# Altium PCB open-rally-computer.pcbdoc
Units mil, origin at the board's own origin, x right, y up, seen from the top; angles counter-clockwise.
Board outline 3960 x 3635 mil, 2 copper layers (Top Layer, Bottom Layer); 24 components, 52 nets, 141 pads, 9 vias.
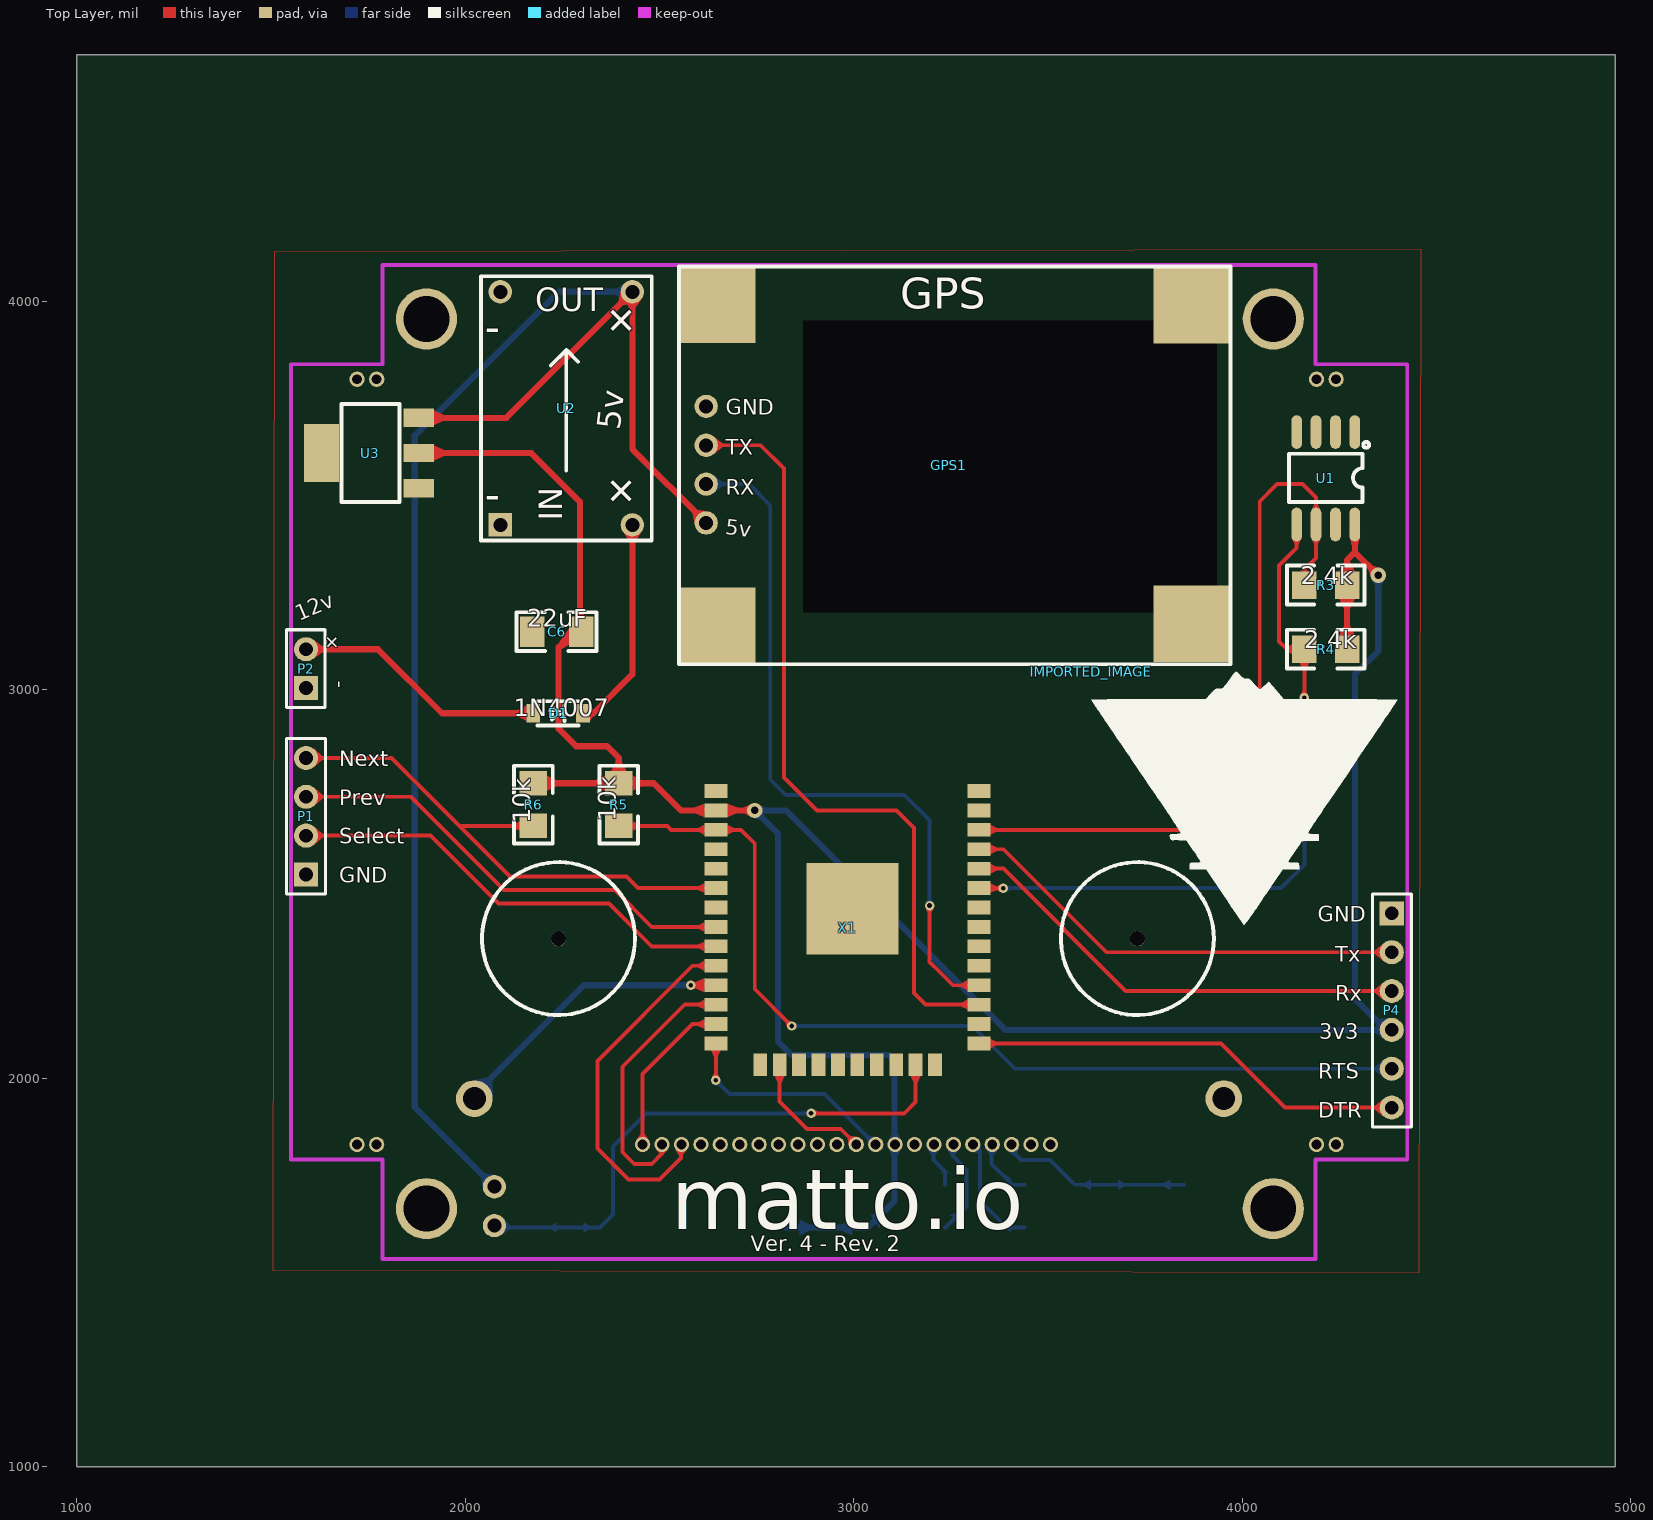
[diagram p0: Top Layer view]
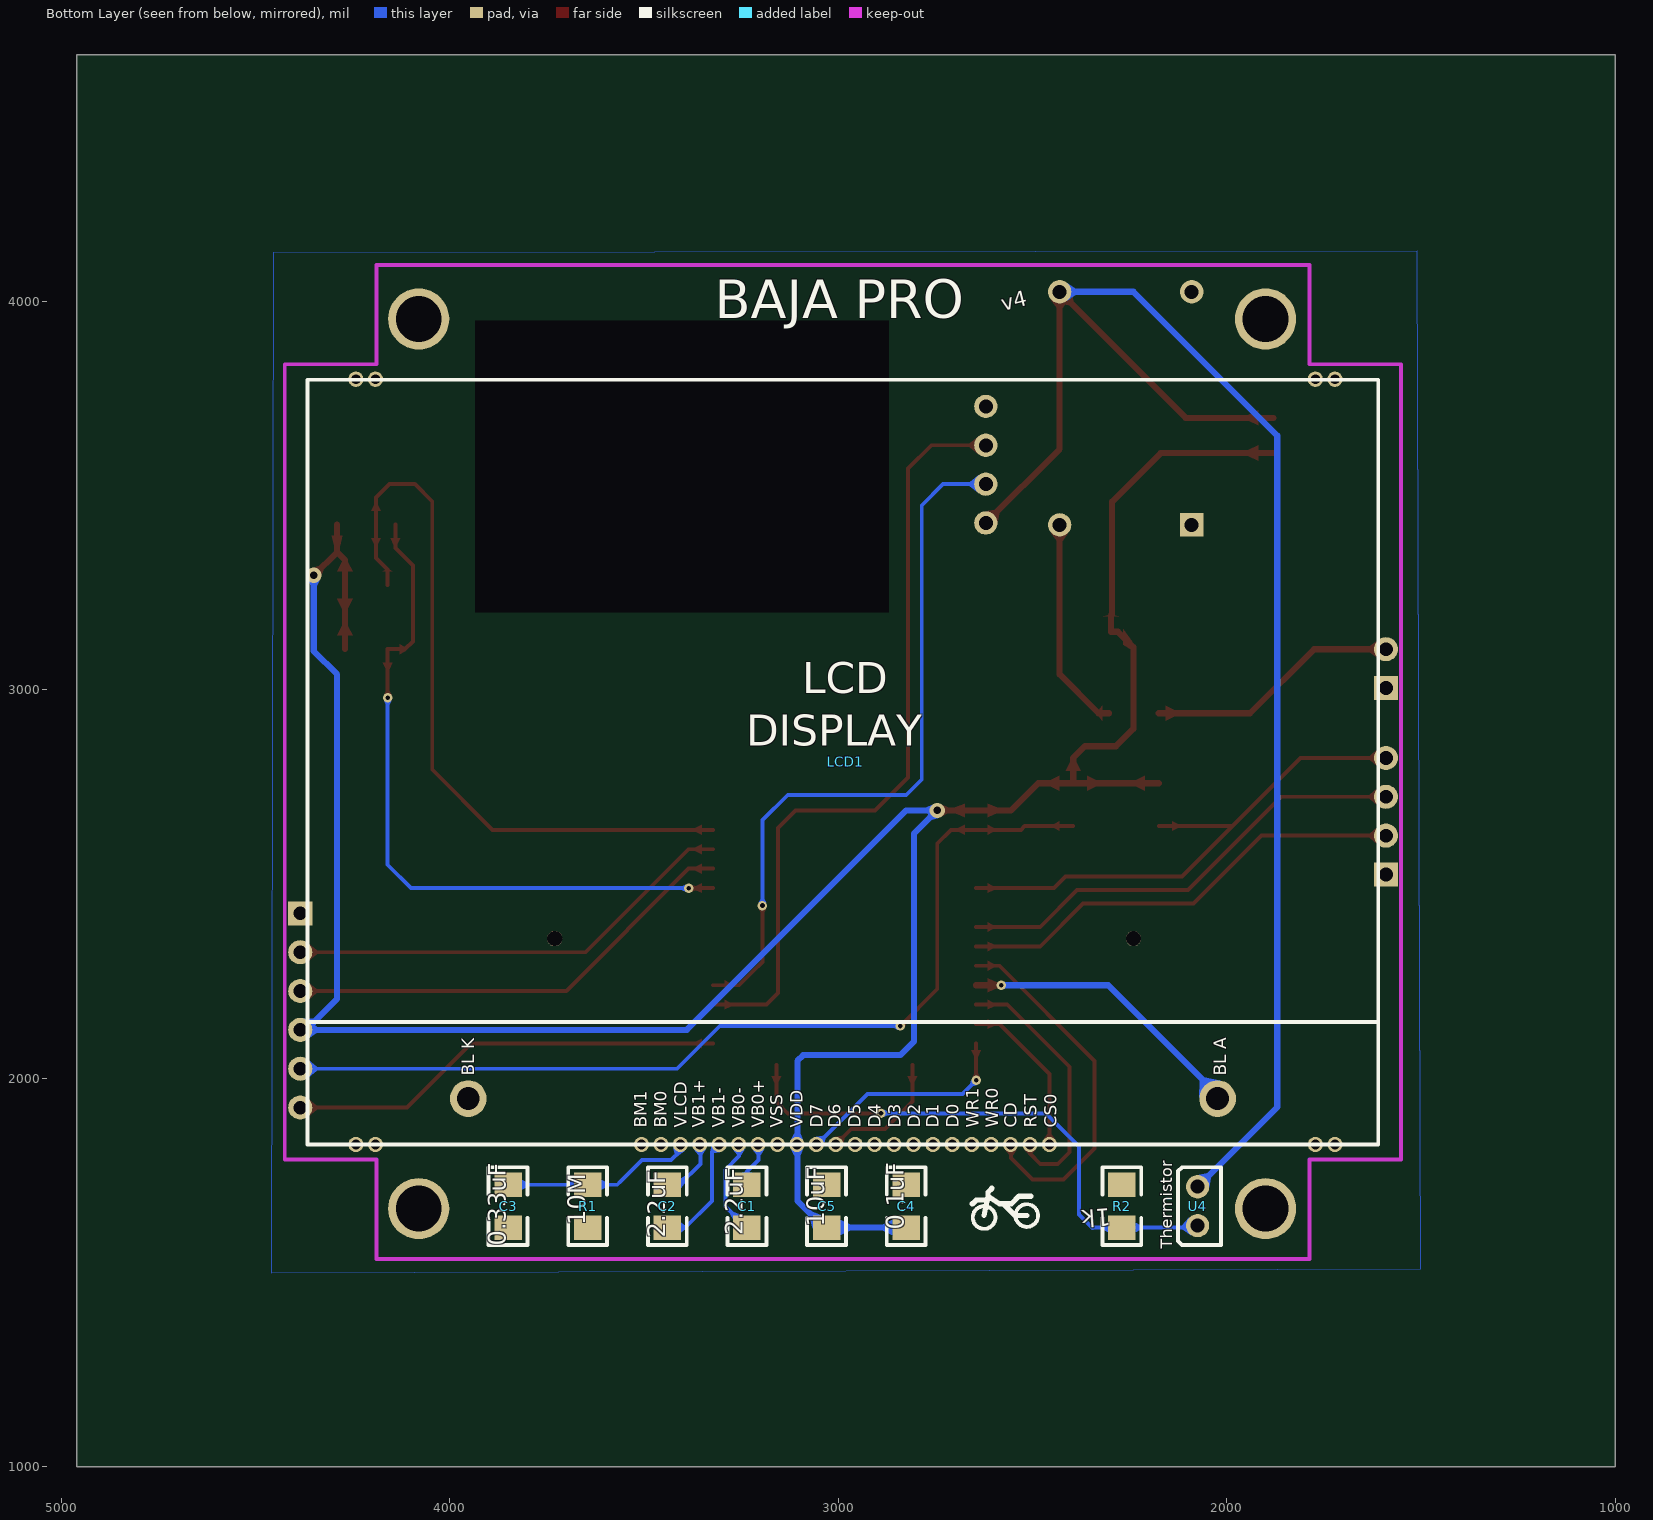
[diagram p1: Bottom Layer view, seen from below]

## Layer stack, top to bottom
Top Layer: signal copper (thickness not stored)
Dielectric: dielectric 12.6, FR-4, Dk 4.8
Bottom Layer: signal copper (thickness not stored)

## Board outline
4960,1000 1000,1000 1000,4635 4960,4635
cut-out: 2870,3950 3935,3950 3935,3200 2870,3200

## Components (designator, comment, footprint, x,y, rotation, side; value= is the part's Value field where it differs from the comment)
C1 "2.2uF" 1206#1 3235,1671.25 r270 bottom
C2 "2.2uF" 1206#1 3440,1671.25 r270 bottom
C3 "0.33uF" 1206#1 3850,1671.25 r270 bottom
C4 "0.1uF" 1206#1 2825,1671.25 r270 bottom
C5 "10uF" 1206#1 3030,1671.25 r270 bottom
C6 "22uF" 1206#2 2235,3150 r0 top
D1 "1N4007" SOD-123F 2235,2940 r0 top
GPS1 "uBlox Neo 6M breakout board" GY-NEO6MV2 2550,4090 r0 top
IMPORTED_IMAGE "IMPORTED_IMAGE" IMPORTED_IMAGE 3611.78,3046.96 r0 top
LCD1 "ERC12864-655 128x64 LCD Display" ERC12864-655 1610,1830 r180 bottom
P1 "Header-Female-2.54_1x4" HDR-4X1/2.54 1590,2625 r90 top
P2 "Header-Female-2.54_1x2" HDR-1X2/2.54 1590,3005 r90 top
P4 "Header-Female-2.54_1x6" HDR-6X1/2.54 4385,2175 r270 top
R1 "10M" 1206#1 3645,1671.25 r270 bottom
R2 "1k" 1206#3 2270,1671.25 r90 bottom
R3 "2.4k" 1206#4 4215,3270 r0 top
R4 "2.4k" 1206#4 4215,3105 r0 top
R5 "10k" 1206#5 2395,2705 r90 top
R6 "10k" 1206#6 2175,2705 r270 top
U1 "FM24CL04B-GTR_C365762" SOIC-8_150MIL 4215,3545 r270 top
U2 "DC-DC stepdown" "DC-DC STEPDOWN" 2260,3725 r90 top
U3 "AMS1117-3.3" SOT-223 1755,3610 r180 top
U4 "Thermistor" THERMISTOR-PCB 2075,1671.25 r0 bottom
X1 "ESP32_WROOM32" WROOM32 2645,2740 r0 top

## Footprints (in the part's own frame and the unit in brackets; to place one, negate y for a bottom-side part, rotate by r counter-clockwise, add the part's x,y. Pads: shape width x height; smd on the part's side, far side on the other; paste and mask are expansions set on the pad)
1206#1 [mil]
  rect 63x70.9 smd: 1(55.05,0.05) 2(-54.95,0.05)
  silkscreen extent -100,-50 100,50
1206#2 [mil]
  rect 63x78.74 smd: 1(-63,0) 2(63,0)
  silkscreen extent -103,-50 103,50
1206#3 [mil]
  rect 63x70.9 smd: 1(54.95,0.05) 2(-55.05,0.05)
  silkscreen extent -100,-50 100,50
1206#4 [mil]
  rect 63x70.9 smd: 1(-55,0.05) 2(55,0.05)
  silkscreen extent -100,-50 100,50
1206#5 [mil]
  rect 63x70.9 smd: 1(-55,-0.05) 2(55,-0.05)
  silkscreen extent -100,-50 100,50
1206#6 [mil]
  rect 63x70.9 smd: 1(-55,0) 2(55,0)
  silkscreen extent -100,-50 100,50
"DC-DC STEPDOWN" [mil]
  rect 60x60 hole 36: 1(-300,170)
  round 60 hole 36: 2(-300,-170) 3(300,-170) 4(300,170)
  silkscreen extent -340,-220 340,220
ERC12864-655 [mm]
  round 1 hole 0.65: 1(-21.499,-0.001) 2(-22.769,-0.001) 3(-24.039,-0.001) 4(-25.309,-0.001) 5(-26.579,-0.001) 6(-27.849,-0.001) 7(-29.119,-0.001) 8(-30.389,-0.001) 9(-31.659,-0.001) 10(-32.929,-0.001) 11(-34.199,-0.001) 12(-35.469,-0.001) 13(-36.739,-0.001) 14(-38.009,-0.001) 15(-39.279,-0.001) 16(-40.549,-0.001) 17(-41.819,-0.001) 18(-43.089,-0.001) 19(-44.359,-0.001) 20(-45.629,-0.001) 21(-46.899,-0.001) 22(-48.169,-0.001) ""(-66.848,-0.001) ""(-66.848,50.037) ""(-65.568,-0.001) ""(-65.568,50.037) ""(-4.11,50.037) ""(-4.11,-0.001) ""(-2.83,-0.001) ""(-2.83,50.037)
  round 2.4 hole 1.5: 23(-10.499,2.999) 24(-59.499,2.999)
  silkscreen extent -70,0 0,50
GY-NEO6MV2 [mil]
  round 60 hole 36: 1(70.08,-360.06) 2(70.08,-460.06) 3(70.08,-560.06) 4(70.08,-660.06)
  rect 196.85x196.85 smd: ""(98.3,-925.15) ""(98.5,-98.5) ""(1320,-920.05) ""(1320.05,-100)
  silkscreen extent 0,-1024 1420,0
HDR-1X2/2.54 [mil]
  rect 62x62 hole 35: 1(0,0)
  round 62 hole 35: 2(100,0)
  silkscreen extent -50,-49 150,50
HDR-4X1/2.54 [mil]
  rect 62x62 hole 35: 1(-100,0)
  round 62 hole 35: 2(0,0) 3(100,0) 4(200,0)
  silkscreen extent -150,-50 250,50
HDR-6X1/2.54 [mil]
  rect 62x62 hole 35: 1(-250,0)
  round 62 hole 35: 2(-150,0) 3(-50,0) 4(50,0) 5(150,0) 6(250,0)
  silkscreen extent -300,-50 300,50
IMPORTED_IMAGE [mil]
  silkscreen extent 0,-652 787,0
SOD-123F [mil]
  rect 35.8x48 smd: 1(-60,0) 2(68,0)
  silkscreen extent -49,-31 57,31
SOIC-8_150MIL [mm]
  oval 2.2x0.7 smd: 1(-3.023,1.905) 2(-3.023,0.635) 3(-3.023,-0.635) 4(-3.023,-1.905) 5(3.023,-1.905) 6(3.023,-0.635) 7(3.023,0.635) 8(3.023,1.905)
  silkscreen extent -2.37,-2.41 1.55,2.83
SOT-223 [mm]
  rect 2x1.2 smd: 1(-3.175,2.3) 2(-3.175,0) 3(-3.175,-2.3)
  rect 2.3x3.8 smd: 4(3.175,0)
  silkscreen extent -1.93,-3.2 1.87,3.2
THERMISTOR-PCB [mil]
  round 60 hole 36: 1(0,-50) 2(0,50)
  silkscreen extent -60,-100 50,100
WROOM32 [mm]
  rect 1.5x0.9 smd: 1(0,0) 2(0,-1.27) 3(0,-2.54) 4(0,-3.81) 5(0,-5.08) 6(0,-6.35) 7(0,-7.62) 8(0,-8.89) 9(0,-10.16) 10(0,-11.43) 11(0,-12.7) 12(0,-13.97) 13(0,-15.24) 14(0,-16.51) 25(17.2,-16.51) 26(17.2,-15.24) 27(17.2,-13.97) 28(17.2,-12.7) 29(17.2,-11.43) 30(17.2,-10.16) 31(17.2,-8.89) 32(17.2,-7.62) 33(17.2,-6.35) 34(17.2,-5.08) 35(17.2,-3.81) 36(17.2,-2.54) 37(17.2,-1.27) 38(17.2,0)
  rect 0.9x1.5 smd: 15(2.901,-17.899) 16(4.171,-17.899) 17(5.441,-17.899) 18(6.711,-17.899) 19(7.981,-17.899) 20(9.251,-17.899) 21(10.521,-17.899) 22(11.791,-17.899) 23(13.061,-17.899) 24(14.331,-17.899)
  rect 6x6 smd: P$1(8.941,-7.7)

## Free pads (board coordinates)
  round 157.48 hole 118.11: ""(1900,1665) ""(1900,3955) ""(4080,1665) ""(4080,3955)
  round 39.37 hole 39.37 unplated: ""(2240,2360) ""(3730,2360)

## Via types
v1: diameter 24.4, hole 12, Top Layer to Bottom Layer, 7 vias
v2: diameter 39.37, hole 19.69, Top Layer to Bottom Layer, 2 vias

## Nets (pads, with @x,y where several pads share a name; then routed paths per layer and width w, separated by ;. In a path a pad name is that pad's centre, name@x,y a point inside that pad or via, vN(x,y) a via of type N, cw(c..) or ccw(c..) an arc to the next point about the centre after c; other vN are vias at no path point)
3V3: C4.1 C5.1 C6.2 LCD1.14 P4.4 R3.2 R4.2 R5.2 R6.1 U1.8 U3.2 X1.2 | length 7049.8
  Top Layer w15.75: U3.2 2170,3610 2295,3485 2295,3195 2298,3192 C6.2 2280,3150 2240,3110 2240,2900 2285,2855 2365,2855 2395,2825 2395.05,2824.95 R5.2 ; R6.1 R5.2 ; v2(2745,2690) X1.2 2555,2690 2485,2760 R5.2 ; R4.2 R3.2 4270,3335 4290,3355 ; U1.8 4290,3355 ; v2(4350,3295) 4290,3355
  Bottom Layer w15.75: C4.1 C5.1 3036.25,1616.25 3105,1685 LCD1.14@3105,1828.56 ; LCD1.14 LCD1.14@3105,1828.56 ; v2(4350,3295) 4350,3100 4290,3040 4290,2205 4370,2125 3390,2125 2825,2690 v2(2745,2690) 2805,2630 2805,2095 2840,2060 3090,2060 3105,2045 LCD1.14@3105,1828.56
5V: GPS1.4 U2.3 U3.3 U4.1 | length 4090.1
  Top Layer w15.75: U3.3 2105.55,3700.55 U2.3 2430,3620.02 GPS1.4
  Bottom Layer w15.75: U4.1 1870,1926.25 1870,3655 2240,4025 U2.3
C1_1: C1.1 LCD1.17 | length 252.3
  Bottom Layer w10: C1.1 3236.25,1616.25 3290,1670 3290,1765 3255,1800 3255,1828.56 LCD1.17
C1_2: C1.2 LCD1.16 | length 116.7
  Bottom Layer w10: LCD1.16 3205,1828.56 3205,1790 3235,1760 C1.2
C2_1: C2.1 LCD1.18 | length 296.1
  Bottom Layer w10: LCD1.18 3325,1811.38 3325,1685 3393.75,1616.25 C2.1
C2_2: C2.2 LCD1.19 | length 157.8
  Bottom Layer w10: LCD1.19 3355,1828.56 3355,1780 3408.75,1726.25 C2.2
C3_2: C3.2 LCD1.20 R1.2 | length 496.1
  Bottom Layer w10: LCD1.20 3406.41,1813.59 3430,1790 3505,1790 3560,1735 3568.75,1726.25 R1.2 C3.2
D1_1: D1.1 P2.2 | length 638.3
  Top Layer w15.75: P2.2@1605,3105 1775,3105 1940,2940 D1.1
D1_2: D1.2 U2.2 | length 553.4
  Top Layer w15.75: D1.2 2330,2940 2430,3040 U2.2
DISPLAY_BL: LCD1.23 X1.11 | length 748.6
  Top Layer w15.75: v1(2580,2240) X1.11
  Bottom Layer w15.75: LCD1.23 2023.35,1958.35 2305,2240 v1(2580,2240)
DISPLAY_CD: LCD1.3 X1.10 | length 938
  Top Layer w10: LCD1.3 2555,1828.56 2555,1795 2500,1740 2420,1740 2340,1820 2340,2045 2585,2290 X1.10
DISPLAY_CS: LCD1.1 X1.13 | length 423.3
  Top Layer w10: LCD1.1 2456.42,2011.42 2585,2140 X1.13
DISPLAY_DATA: LCD1.13 X1.14 | length 574.8
  Top Layer w10: v1(2645,1995) X1.14
  Bottom Layer w10: v1(2645,1995) 2680,1960 2925,1960 3055.03,1829.97 LCD1.13
DISPLAY_RST: LCD1.2 X1.12 | length 674.6
  Top Layer w10: LCD1.2 2506.41,1806.41 2480,1780 2435,1780 2405,1810 2405,2030 2565,2190 X1.12
DISPLAY_SCLK: LCD1.12 X1.16 | length 337.6
  Top Layer w10: X1.16 2809.17,1940.83 2880,1870 2966.38,1870 LCD1.12
FLASH_DTR: P4.6 X1.25 | length 1116.2
  Top Layer w10: X1.25 3945,2090 4110,1925 P4.6@4370,1925
FLASH_RTS: P4.5 R5.1 X1.3 | length 2453.5
  Top Layer w10: R5.1 2520,2650 2530,2640 X1.3 2710,2640 2745,2605 2745,2230 v1(2840,2135)
  Bottom Layer w10: v1(2840,2135) 3305,2135 3415,2025 P4.5@4370,2025
FLASH_RX: P4.3 X1.34 | length 1178.3
  Top Layer w10: X1.34 3385,2540 3700,2225 P4.3@4370,2225
FLASH_TX: P4.2 X1.35 | length 1157.6
  Top Layer w10: X1.35 3385,2590 3650,2325 P4.2@4370,2325
GND: C3.1 C4.2 C5.2 C6.1 GPS1.1 LCD1.4 LCD1.5 LCD1.6 LCD1.7 LCD1.8 LCD1.9 LCD1.10 LCD1.11 LCD1.15 LCD1.21 LCD1.22 LCD1.24 P1.1 P2.1 P4.1 R1.1 R2.1 U1.1 U1.2 U1.3 U1.4 U1.7 U2.1 U2.4 U3.1 X1.1 X1.15 X1.38 X1.P$1
GPS_RX: GPS1.3 X1.28 | length 1863.1
  Top Layer w10: v1(3195,2445) 3195,2300 3220,2275 3255,2240 X1.28
  Bottom Layer w10: GPS1.3@2620.1,3530 2729.9,3530 2785,3475 2785,2770 2825,2730 3130,2730 3195,2665 v1(3195,2445)
GPS_TX: GPS1.2 X1.27 | length 2013.1
  Top Layer w10: GPS1.2 2760,3630 2820,3570 2820,2775 2905,2690 3110,2690 3155,2645 3155,2220 3185,2190 X1.27@3322.1,2190
MEM_SCL: R3.1 U1.6 X1.36 | length 1892.6
  Top Layer w10: X1.36 3890,2640 4045,2795 4045,3485 4090,3530 4155,3530 4190,3495 U1.6 4190,3340 4160,3310 R3.1
MEM_SDA: R4.1 U1.5 X1.33 | length 1810.7
  Top Layer w10: X1.33 v1(3385,2490) ; U1.5 4140,3365 4095,3320 4095,3125 4115,3105 4115.05,3105.05 R4.1 v1(4160,2980)
  Bottom Layer w10: v1(3385,2490) 4100,2490 4160,2550 v1(4160,2980)
R_NEXT: P1.4 R6.2 X1.6 | length 1368.7
  Top Layer w10: P1.4@1605,2825 1810,2825 2115,2520 2415,2520 2445,2490 X1.6 ; 1985.09,2649.91 1985.17,2650 R6.2
R_PREV: P1.3 X1.8 | length 1178.8
  Top Layer w10: P1.3@1605,2725 1860,2725 2100,2485 2385,2485 2480,2390 X1.8
R_SELECT: P1.2 X1.9 | length 1158.1
  Top Layer w10: P1.2@1605,2625 1910,2625 2085,2450 2370,2450 2480,2340 X1.9
S$21: 
S$23: 
S$170: 
S$172: 
S$1077: 
S$1079: 
S$1083: 
S$1086: 
TEMP: R2.2 U4.2 X1.23 | length 1419.7
  Top Layer w10: v1(2890,1910) 3130,1910 3159.17,1939.17 X1.23
  Bottom Layer w10: U4.2 2080,1616.25 R2.2 2343.75,1616.25 2345,1615 2380,1650 2380,1825 2465,1910 v1(2890,1910)
U3_4: U3.4
X1_4: X1.4
X1_5: X1.5
X1_7: X1.7
X1_17: X1.17
X1_18: X1.18
X1_19: X1.19
X1_20: X1.20
X1_21: X1.21
X1_22: X1.22
X1_24: X1.24
X1_26: X1.26
X1_29: X1.29
X1_30: X1.30
X1_31: X1.31
X1_37: X1.37
pads on no net: GPS1. LCD1. X1.32

## Polygon pours and split planes (outlines as drawn)
GND on Bottom Layer (solid): 1510,4130 4455,4125 4460,1500 1500,1510
GND on Top Layer (solid): 1510,4130 4460,4135 4455,1500 1505,1505

## Other copper
Top Layer:
  region net MEM_SDA: 4152.5,3390.7 4127.5,3390.7 4135,3375.7 4145,3375.7
  region net MEM_SCL: 4202.5,3461.3 4177.5,3461.3 4185,3476.3 4195,3476.3
  region net MEM_SCL: 4202.5,3390.7 4177.5,3390.7 4185,3375.7 4195,3375.7
  region net 3V3: 4303.78,3396.5 4276.22,3396.5 4282.13,3372.88 4297.87,3372.88
  region net R_NEXT: 2139.6,2637.5 2139.6,2662.5 2124.6,2655 2124.6,2645
  region net 3V3: 2210.5,2779.68 2210.5,2740.32 2234.12,2752.13 2234.12,2767.87
  region net 3V3: 2266.5,3116.81 2266.5,3156.18 2242.88,3124.01 2242.88,3101.74
  region net 3V3: 2278.32,3189.4 2317.69,3189.4 2305.87,3192 2290.13,3192
  region net 3V3: 2430.5,2779.68 2430.5,2740.32 2454.12,2752.13 2454.12,2767.87
  region net 3V3: 2359.6,2740.32 2359.6,2779.68 2335.98,2767.87 2335.98,2752.13
  region net 3V3: 2375.36,2791.5 2414.73,2791.5 2402.92,2815.12 2387.17,2815.12
  region net FLASH_RTS: 2430.5,2662.5 2430.5,2637.5 2445.5,2645 2445.5,2655
  region net 3V3: 4250.31,3140.5 4289.69,3140.5 4277.87,3164.12 4262.13,3164.12
  region net MEM_SDA: 4128.5,3092.55 4128.5,3117.55 4115.05,3110.05 4115.05,3100.05
  region net MEM_SDA: 4172.5,3069.6 4147.5,3069.6 4155,3054.6 4165,3054.6
  region net 3V3: 4250.31,3305.5 4289.69,3305.5 4277.87,3329.12 4262.13,3329.12
  region net 3V3: 4289.69,3234.6 4250.31,3234.6 4262.13,3210.98 4277.87,3210.98
  region net MEM_SCL: 4147.5,3305.5 4172.5,3305.5 4165,3310 4155,3310
  region net 5V: 1919.4,3720.23 1919.4,3680.86 1943.02,3692.68 1943.02,3708.42
  region net 3V3: 1919.4,3629.68 1919.4,3590.32 1943.02,3602.13 1943.02,3617.87
  region net MEM_SCL: 3351.7,2652.5 3351.7,2627.5 3366.7,2635 3366.7,2645
  region net FLASH_TX: 3351.7,2602.5 3351.7,2577.5 3366.7,2585 3366.7,2595
  region net FLASH_RX: 3351.7,2552.5 3351.7,2527.5 3366.7,2535 3366.7,2545
  region net MEM_SDA: 3351.7,2502.5 3351.7,2477.5 3366.7,2485 3366.7,2495
  region net GPS_RX: 3292.6,2227.5 3292.6,2252.5 3277.6,2245 3277.6,2235
  region net GPS_TX: 3292.6,2177.5 3292.6,2202.5 3277.6,2195 3277.6,2185
  region net FLASH_DTR: 3351.7,2102.5 3351.7,2077.5 3366.7,2085 3366.7,2095
  region net TEMP: 3171.67,2005.8 3146.67,2005.8 3154.17,1990.8 3164.17,1990.8
  region net DISPLAY_SCLK: 2821.67,2005.8 2796.67,2005.8 2804.17,1990.8 2814.17,1990.8
  region net DISPLAY_DATA: 2657.5,2072.3 2632.5,2072.3 2640,2057.3 2650,2057.3
  region net DISPLAY_CS: 2615.5,2127.5 2615.5,2152.5 2600.5,2145 2600.5,2135
  region net DISPLAY_RST: 2615.5,2177.5 2615.5,2202.5 2600.5,2195 2600.5,2185
  region net DISPLAY_BL: 2615.5,2222.3 2615.5,2257.7 2591.88,2247.87 2591.88,2232.13
  region net DISPLAY_CD: 2615.5,2277.5 2615.5,2302.5 2600.5,2295 2600.5,2285
  region net R_SELECT: 2615.5,2327.5 2615.5,2352.5 2600.5,2345 2600.5,2335
  region net R_PREV: 2615.5,2377.5 2615.5,2402.5 2600.5,2395 2600.5,2385
  region net R_NEXT: 2615.5,2477.5 2615.5,2502.5 2600.5,2495 2600.5,2485
  region net FLASH_RTS: 2615.5,2627.5 2615.5,2652.5 2600.5,2645 2600.5,2635
  region net FLASH_RTS: 2674.5,2652.5 2674.5,2627.5 2689.5,2635 2689.5,2645
  region net 3V3: 2615.5,2672.3 2615.5,2707.7 2591.88,2697.87 2591.88,2682.13
  region net 3V3: 2674.5,2707.7 2674.5,2672.3 2698.12,2682.13 2698.12,2697.87
  region net D1_2: 2320.9,2959.68 2320.9,2920.32 2330,2932.13 2330,2947.87
  region net D1_1: 2157.1,2920.32 2157.1,2959.68 2133.48,2947.87 2133.48,2932.13
  region net MEM_SDA: 4150.85,2988.07 4169.15,2988.07 4165,2996.61 4155,2996.61
  region net MEM_SDA: 3376.93,2480.85 3376.93,2499.15 3368.39,2495 3368.39,2485
  region net GPS_RX: 3185.85,2436.93 3204.15,2436.93 3200,2428.39 3190,2428.39
  region net 3V3: 4330.35,3293.77 4351.23,3314.65 4336.62,3319.52 4325.48,3308.38
  region net TEMP: 2898.07,1900.85 2898.07,1919.15 2906.61,1915 2906.61,1905
  region net DISPLAY_DATA: 2635.85,2003.07 2654.15,2003.07 2650,2011.61 2640,2011.61
  region net DISPLAY_BL: 2588.07,2230.85 2588.07,2249.15 2596.61,2247.87 2596.61,2232.13
  region net FLASH_RTS: 2840.76,2147.18 2827.82,2134.24 2824.72,2143.21 2831.79,2150.28
  region net 3V3: 2731.98,2675.24 2731.98,2704.76 2718.2,2697.87 2718.2,2682.13
  region net D1_1: 1610.5,3081.75 1610.5,3128.25 1632.2,3112.87 1632.2,3097.13
  region net R_NEXT: 1610.5,2801.75 1610.5,2848.25 1632.2,2830 1632.2,2820
  region net R_PREV: 1610.5,2701.75 1610.5,2748.25 1632.2,2730 1632.2,2720
  region net R_SELECT: 1610.5,2601.75 1610.5,2648.25 1632.2,2630 1632.2,2620
  region net FLASH_TX: 4364.5,2301.75 4364.5,2348.25 4342.8,2330 4342.8,2320
  region net FLASH_RX: 4364.5,2201.75 4364.5,2248.25 4342.8,2230 4342.8,2220
  region net FLASH_DTR: 4364.5,1901.75 4364.5,1948.25 4342.8,1930 4342.8,1920
  region net 5V: 2590.14,3428.06 2621.96,3459.88 2596.77,3464.39 2585.63,3453.25
  region net GPS_TX: 2639.93,3652.43 2639.92,3607.43 2660.92,3624.93 2660.92,3634.93
  region net D1_2: 2452.5,3405.16 2407.5,3405.16 2422.13,3384.16 2437.87,3384.16
  region net 5V: 2452.5,4005.16 2407.5,4005.16 2422.13,3984.16 2437.87,3984.16
  region net 5V: 2400.06,4026.88 2431.88,3995.06 2406.69,3990.55 2395.55,4001.69
  region net DISPLAY_SCLK: 2986.76,1828.74 3007.64,1849.62 2991,1852.46 2983.93,1845.39
  region net DISPLAY_CD: 2570.47,1816.19 2540.98,1817.75 2550,1803.47 2560,1802.94
  region net DISPLAY_RST: 2521.17,1816.95 2491.65,1816.95 2501.41,1806.41 2511.41,1806.41
  region net DISPLAY_CS: 2471.18,1842.99 2441.66,1842.99 2451.42,1856.77 2461.42,1856.77
Bottom Layer:
  region net 3V3: 3043.77,1647.7 3065.4,1614.81 3074.74,1643.6 3065.9,1657.04
  region net 3V3: 2994.5,1635.93 2994.5,1596.57 2970.88,1608.38 2970.88,1624.12
  region net TEMP: 2305.5,1603.75 2305.5,1628.75 2320.5,1621.25 2320.5,1611.25
  region net TEMP: 2234.6,1628.75 2234.6,1603.75 2219.6,1611.25 2219.6,1621.25
  region net C3_2: 3680.4,1713.75 3680.4,1738.75 3695.4,1731.25 3695.4,1721.25
  region net C3_2: 3609.5,1738.75 3609.5,1713.75 3594.5,1721.25 3594.5,1731.25
  region net 3V3: 2860.4,1596.57 2860.4,1635.93 2884.02,1624.12 2884.02,1608.38
  region net C3_2: 3814.5,1738.75 3814.5,1713.75 3799.5,1721.25 3799.5,1731.25
  region net C2_2: 3404.5,1743 3404.5,1718 3389.5,1738.43 3389.5,1752.57
  region net C2_1: 3404.5,1628.75 3404.5,1603.75 3393.75,1611.25 3393.75,1621.25
  region net C1_2: 3247.5,1757.7 3222.5,1757.7 3230,1760 3240,1760
  region net C1_1: 3247.58,1647.7 3270.4,1637.49 3277.72,1650.65 3267.95,1655.02
  region net MEM_SDA: 4150.85,2971.93 4169.15,2971.93 4165,2963.39 4155,2963.39
  region net MEM_SDA: 3393.07,2480.85 3393.07,2499.15 3401.61,2495 3401.61,2485
  region net GPS_RX: 3185.85,2453.07 3204.15,2453.07 3200,2461.61 3190,2461.61
  region net 3V3: 4364.76,3281.98 4335.24,3281.98 4342.13,3268.2 4357.87,3268.2
  region net TEMP: 2881.93,1900.85 2881.93,1919.15 2873.39,1915 2873.39,1905
  region net DISPLAY_DATA: 2657.18,1995.76 2644.24,1982.82 2653.21,1979.72 2660.28,1986.79
  region net DISPLAY_BL: 2571.93,2230.85 2571.93,2249.15 2563.39,2247.87 2563.39,2232.13
  region net FLASH_RTS: 2848.07,2125.85 2848.07,2144.15 2856.61,2140 2856.61,2130
  region net 3V3: 2743.77,2670.35 2764.65,2691.23 2769.52,2676.62 2758.38,2665.48
  region net 3V3: 2758.02,2675.24 2758.02,2704.76 2771.8,2697.87 2771.8,2682.13
  region net 3V3: 4379.1,2155.43 4355.54,2115.35 4344.49,2139.37 4352.74,2153.4
  region net 3V3: 4364.5,2101.75 4364.5,2148.25 4342.8,2132.87 4342.8,2117.13
  region net FLASH_RTS: 4364.5,2001.75 4364.5,2048.25 4342.8,2030 4342.8,2020
  region net GPS_RX: 2639.95,3507.47 2639.89,3552.47 2660.91,3535 2660.93,3525
  region net 5V: 2410.16,4002.5 2410.16,4047.5 2389.16,4032.87 2389.16,4017.13
  region net 5V: 2045.06,1719.37 2076.88,1751.19 2051.69,1755.7 2040.55,1744.56
  region net TEMP: 2097.45,1641.15 2091.94,1596.49 2114.92,1611.25 2116.15,1621.25
  region net DISPLAY_BL: 2070.53,1950.46 2015.09,1994.6 2057.21,2003.34 2069.61,1993.47
  region net C3_2: 3396.81,1812.79 3424.66,1822.59 3420.54,1806.53 3410.08,1802.85
  region net C2_2: 3370.47,1816.19 3340.98,1817.75 3350,1803.47 3360,1802.94
  region net C2_1: 3305.18,1810.32 3326.06,1831.2 3328.54,1814.91 3321.46,1807.84
  region net C1_1: 3270.47,1816.19 3240.98,1817.75 3250,1803.47 3260,1802.94
  region net C1_2: 3220.47,1816.19 3190.98,1817.75 3200,1803.47 3210,1802.94
  region net 3V3: 3120.47,1843.75 3090.98,1842.2 3097.13,1856.32 3112.87,1857.15
  region net 3V3: 3120.47,1816.19 3090.98,1817.75 3097.13,1803.62 3112.87,1802.79
  region net DISPLAY_DATA: 3056.93,1849.65 3036.82,1828.02 3033.38,1844.55 3040.19,1851.88

## Silkscreen, mask and mechanical layers (free items; w line width, h text height)
Top Overlay:
  circle w10: c3730,2360 r196.85
  circle w10: c2240,2360 r196.85
  text "12v" at 1572.69,3176.88 h39.37 r23
  text "+" at 1683.92,3117.82 h39.37 r135
  text "-" at 1689.68,3005 h39.37 r90
  text "Next" at 1675,2803.82 h39.37
  text "Prev" at 1675,2703.82 h39.37
  text "Select" at 1675,2603.82 h39.37
  text "GND" at 1675,2503.82 h39.37
  text "GND" at 4195,2403.82 h39.37
  text "Tx" at 4240,2300.32 h39.37
  text "Rx" at 4240,2200.32 h39.37
  text "3v3" at 4197.7,2100.82 h39.37
  text "RTS" at 4195.9,1999.82 h39.37
  text "DTR" at 4195.9,1898.82 h39.37
  text "matto.io" at 2530,1611.26 h157.48
  text "Ver. 4 - Rev. 2" at 2735,1555.32 h39.37
Bottom Overlay:
  circle w10: c2624.58,1642.08 r29.16
  circle w10: c2514.58,1647.08 r29.16
  lines w13.78 net S$1077: 2514.58,1647.08 2544.58,1647.08 2574.58,1677.08 2584.58,1677.08 2614.58,1697.08 2624.58,1647.08
  lines w13.78 net S$1079: 2504.58,1697.08 2534.58,1697.08 2554.58,1677.08 2574.58,1677.08
  lines w13.78 net S$1083: 2614.58,1687.08 2644.58,1687.08 2654.58,1677.08
  lines w13.78 net S$1086: 2604.58,1717.08 2614.58,1707.08 2614.58,1697.08
  text "v4" at 2575.37,3974.43 h39.37 r346
  text "BAJA PRO" at 3318.45,3957.1 h98.42

## Text inside footprints (layer, text, board x,y; h text height)
GPS1: Top Overlay "GPS" at 3119.97,3981.39 h80; Top Overlay "GND" at 2669.9,3708.82 h39.37; Top Overlay "TX" at 2669.9,3606.01 h39.37; Top Overlay "RX" at 2669.9,3503.22 h39.37; Top Overlay "5v" at 2667.5,3400.56 h39.37 r353
LCD1: Bottom Overlay "DISPLAY" at 3236.73,2856.36 h80; Bottom Overlay "LCD" at 3092.09,2991.36 h80; Bottom Overlay "CS0" at 2437.84,1873.32 h31.5 r270; Bottom Overlay "RST" at 2489.02,1873.32 h31.5 r270; Bottom Overlay "CD" at 2540.2,1873.32 h31.5 r270; Bottom Overlay "WR0" at 2587.44,1873.32 h31.5 r270; Bottom Overlay "WR1" at 2638.62,1873.32 h31.5 r270; Bottom Overlay "D0" at 2689.81,1873.32 h31.5 r270; Bottom Overlay "D1" at 2740.99,1873.32 h31.5 r270; Bottom Overlay "D2" at 2788.23,1873.32 h31.5 r270; Bottom Overlay "D3" at 2839.41,1873.32 h31.5 r270; Bottom Overlay "D4" at 2890.59,1873.32 h31.5 r270; Bottom Overlay "D5" at 2941.77,1873.32 h31.5 r270; Bottom Overlay "D6" at 2992.96,1873.32 h31.5 r270; Bottom Overlay "D7" at 3040.2,1873.32 h31.5 r270; Bottom Overlay "VDD" at 3091.37,1873.32 h31.5 r270; Bottom Overlay "VSS" at 3142.56,1873.32 h31.5 r270; Bottom Overlay "VB0+" at 3189.8,1873.32 h31.5 r270; Bottom Overlay "VB0-" at 3240.99,1873.32 h31.5 r270; Bottom Overlay "VB1-" at 3292.17,1873.32 h31.5 r270; Bottom Overlay "VB1+" at 3343.34,1873.32 h31.5 r270; Bottom Overlay "VLCD" at 3390.59,1873.32 h31.5 r270; Bottom Overlay "BM0" at 3441.77,1873.32 h31.5 r270; Bottom Overlay "BM1" at 3492.95,1873.32 h31.5 r270; Bottom Overlay "BL K" at 3936.68,2007.11 h31.5 r270; Bottom Overlay "BL A" at 2000.83,2007.18 h31.5 r270
U2: Top Overlay "IN" at 2250,3435 h60 r90; Top Overlay "OUT" at 2180,3975 h60; Top Overlay "+" at 2458.28,3943.28 h80 r135; Top Overlay "-" at 2090,3955 h80 r180; Top Overlay "-" at 2090,3525 h80 r180; Top Overlay "+" at 2458.28,3503.28 h80 r135; Top Overlay "5v" at 2397.48,3667.44 h60 r83